# Altium PCB StepMotor_pcb.PcbDoc (part 2 of 2)
Units mm, origin at the board's own origin, x right, y up, seen from the top; angles counter-clockwise.
Board outline 118.92 x 65.15 mm, 2 copper layers (Top Layer, Bottom Layer); 184 components, 60 nets, 864 pads, 72 vias.
Unrouted connection lines stored in the file: 2.
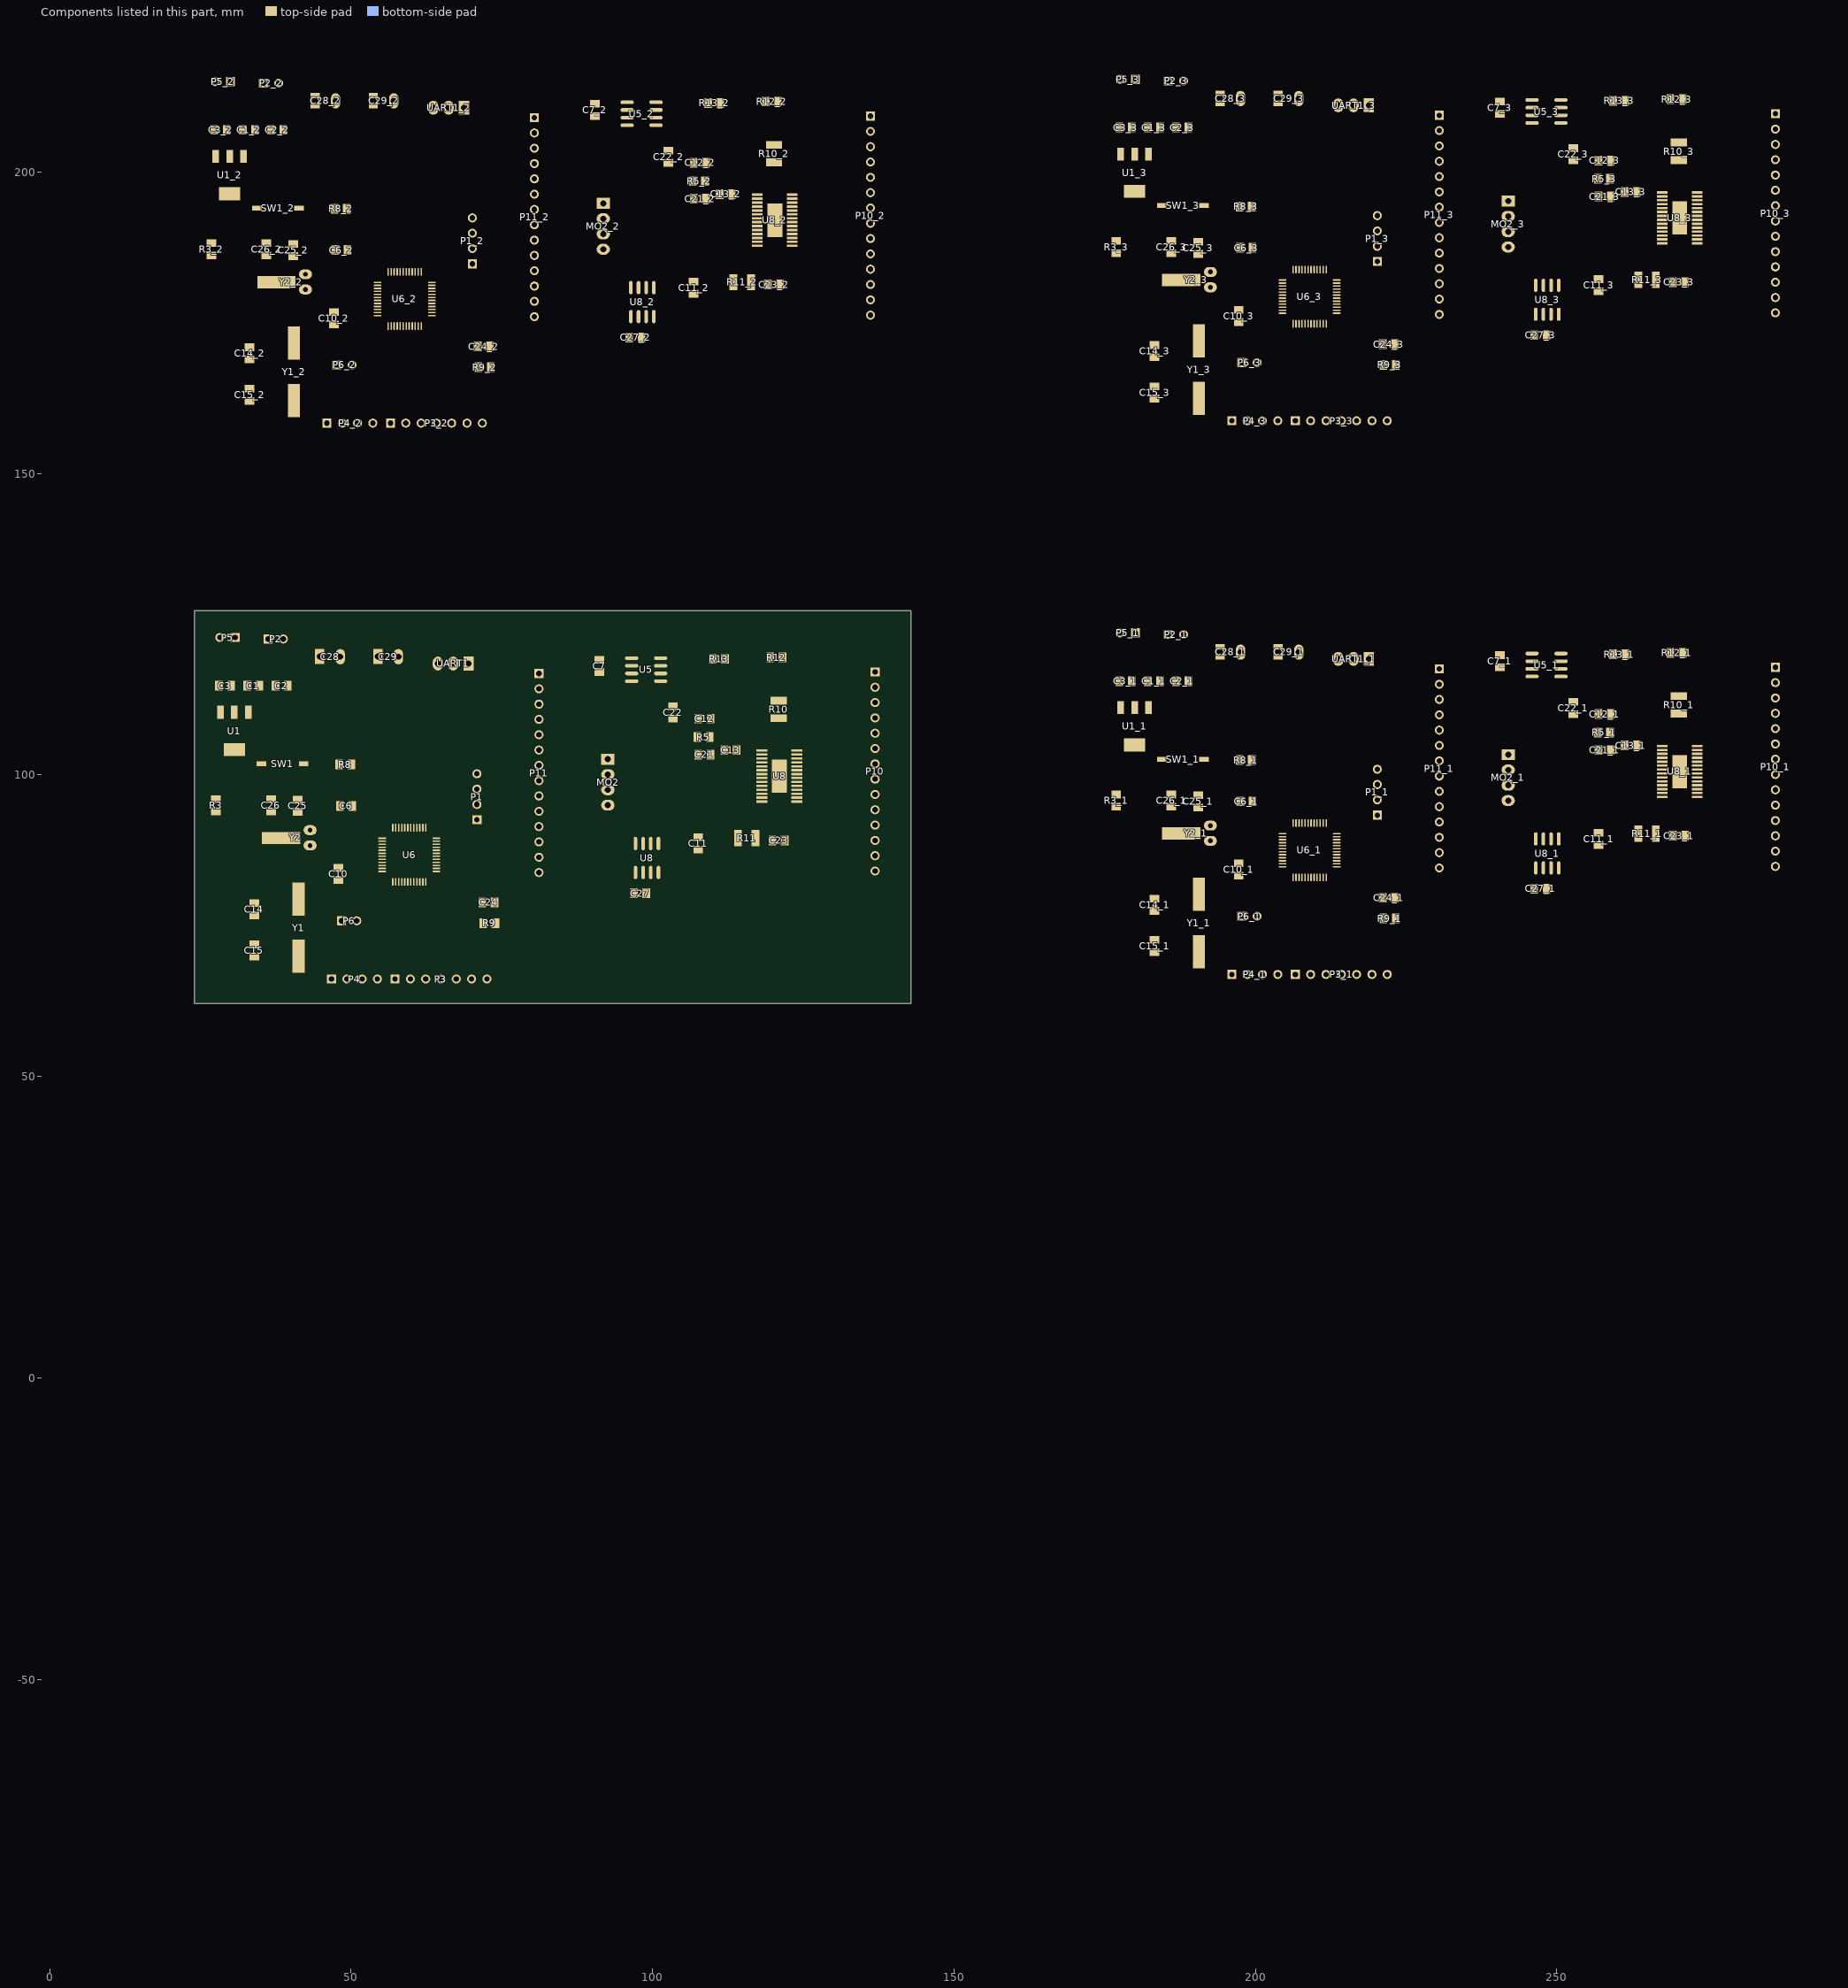
[diagram p2: the components of this part, seen from the top]

## Via types
v1: diameter 1.27, hole 0.711, Top Layer to Bottom Layer, 72 vias

## Nets (pads, with @x,y where several pads share a name; then routed paths per layer and width w, separated by ;. In a path a pad name is that pad's centre, name@x,y a point inside that pad or via, vN(x,y) a via of type N, cw(c..) or ccw(c..) an arc to the next point about the centre after c; other vN are vias at no path point) (continued)
pads on no net: C1_1.1 C1_1.2 C1_2.1 C1_2.2 C1_3.1 C1_3.2 C2_1.1 C2_1.2 C2_2.1 C2_2.2 C2_3.1 C2_3.2 C3_1.1 C3_1.2 C3_2.1 C3_2.2 C3_3.1 C3_3.2 C6_1.1 C6_1.2 C6_2.1 C6_2.2 C6_3.1 C6_3.2 C7_1.1 C7_1.2 C7_2.1 C7_2.2 C7_3.1 C7_3.2 C10_1.1 C10_1.2 C10_2.1 C10_2.2 C10_3.1 C10_3.2 C11_1.1 C11_1.2 C11_2.1 C11_2.2 C11_3.1 C11_3.2 C12_1.1 C12_1.2 C12_2.1 C12_2.2 C12_3.1 C12_3.2 C13_1.1 C13_1.2 C13_2.1 C13_2.2 C13_3.1 C13_3.2 C14_1.1 C14_1.2 C14_2.1 C14_2.2 C14_3.1 C14_3.2 C15_1.1 C15_1.2 C15_2.1 C15_2.2 C15_3.1 C15_3.2 C21_1.1 C21_1.2 C21_2.1 C21_2.2 C21_3.1 C21_3.2 C22_1.1 C22_1.2 C22_2.1 C22_2.2 C22_3.1 C22_3.2 C23_1.1 C23_1.2 C23_2.1 C23_2.2 C23_3.1 C23_3.2 C24_1.1 C24_1.2 C24_2.1 C24_2.2 C24_3.1 C24_3.2 C25_1.1 C25_1.2 C25_2.1 C25_2.2 C25_3.1 C25_3.2 C26_1.1 C26_1.2 C26_2.1 C26_2.2 C26_3.1 C26_3.2 C27_1.1 C27_1.2 C27_2.1 C27_2.2 C27_3.1 C27_3.2 C28_1.1 C28_1.2 C28_2.1 C28_2.2 C28_3.1 C28_3.2 C29_1.1 C29_1.2 C29_2.1 C29_2.2 C29_3.1 C29_3.2 MO2_1.1 MO2_1.2 MO2_1.3 MO2_1.4 MO2_2.1 MO2_2.2 MO2_2.3 MO2_2.4 MO2_3.1 MO2_3.2 MO2_3.3 MO2_3.4 P1_1.1 P1_1.2 P1_1.3 P1_1.4 P1_2.1 P1_2.2 P1_2.3 P1_2.4 P1_3.1 P1_3.2 P1_3.3 P1_3.4 P2_1.1 P2_1.2 P2_2.1 P2_2.2 P2_3.1 P2_3.2 P3.1 P3.2 P3.3 P3_1.1 P3_1.2 P3_1.3 P3_1.4 P3_1.5 P3_1.6 P3_1.7 P3_2.1 P3_2.2 P3_2.3 P3_2.4 P3_2.5 P3_2.6 P3_2.7 P3_3.1 P3_3.2 P3_3.3 P3_3.4 P3_3.5 P3_3.6 P3_3.7 P4_1.1 P4_1.2 P4_1.3 P4_1.4 P4_2.1 P4_2.2 P4_2.3 P4_2.4 P4_3.1 P4_3.2 P4_3.3 P4_3.4 P5_1.1 P5_1.2 P5_2.1 P5_2.2 P5_3.1 P5_3.2 P6_1.1 P6_1.2 P6_2.1 P6_2.2 P6_3.1 P6_3.2 P10.10 P10.14 P10_1.1 P10_1.2 P10_1.3 P10_1.4 P10_1.5 P10_1.6 P10_1.7 P10_1.8 P10_1.9 P10_1.10 P10_1.11 P10_1.12 P10_1.13 P10_1.14 P10_2.1 P10_2.2 P10_2.3 P10_2.4 P10_2.5 P10_2.6 P10_2.7 P10_2.8 P10_2.9 P10_2.10 P10_2.11 P10_2.12 P10_2.13 P10_2.14 P10_3.1 P10_3.2 P10_3.3 P10_3.4 P10_3.5 P10_3.6 P10_3.7 P10_3.8 P10_3.9 P10_3.10 P10_3.11 P10_3.12 P10_3.13 P10_3.14 P11.10 P11_1.1 P11_1.2 P11_1.3 P11_1.4 P11_1.5 P11_1.6 P11_1.7 P11_1.8 P11_1.9 P11_1.10 P11_1.11 P11_1.12 P11_1.13 P11_1.14 P11_2.1 P11_2.2 P11_2.3 P11_2.4 P11_2.5 P11_2.6 P11_2.7 P11_2.8 P11_2.9 P11_2.10 P11_2.11 P11_2.12 P11_2.13 P11_2.14 P11_3.1 P11_3.2 P11_3.3 P11_3.4 P11_3.5 P11_3.6 P11_3.7 P11_3.8 P11_3.9 P11_3.10 P11_3.11 P11_3.12 P11_3.13 P11_3.14 R3_1.1 R3_1.2 R3_2.1 R3_2.2 R3_3.1 R3_3.2 R5_1.1 R5_1.2 R5_2.1 R5_2.2 R5_3.1 R5_3.2 R8_1.1 R8_1.2 R8_2.1 R8_2.2 R8_3.1 R8_3.2 R9_1.1 R9_1.2 R9_2.1 R9_2.2 R9_3.1 R9_3.2 R10_1.1 R10_1.2 R10_2.1 R10_2.2 R10_3.1 R10_3.2 R11_1.1 R11_1.2 R11_2.1 R11_2.2 R11_3.1 R11_3.2 R12_1.1 R12_1.2 R12_2.1 R12_2.2 R12_3.1 R12_3.2 R13_1.1 R13_1.2 R13_2.1 R13_2.2 R13_3.1 R13_3.2 SW1_1.1 SW1_1.2 SW1_2.1 SW1_2.2 SW1_3.1 SW1_3.2 U1_1.1 U1_1.2 U1_1.3 U1_1.4 U1_2.1 U1_2.2 U1_2.3 U1_2.4 U1_3.1 U1_3.2 U1_3.3 U1_3.4 U5_1.1 U5_1.2 U5_1.3 U5_1.4 U5_1.5 U5_1.6 U5_1.7 U5_1.8 U5_2.1 U5_2.2 U5_2.3 U5_2.4 U5_2.5 U5_2.6 U5_2.7 U5_2.8 U5_3.1 U5_3.2 U5_3.3 U5_3.4 U5_3.5 U5_3.6 U5_3.7 U5_3.8 U6.2 U6.12 U6.13 U6.28 U6.33 U6.45 U6.46 U6_1.1 U6_1.2 U6_1.3 U6_1.4 U6_1.5 U6_1.6 U6_1.7 U6_1.8 U6_1.9 U6_1.10 U6_1.11 U6_1.12 U6_1.13 U6_1.14 U6_1.15 U6_1.16 U6_1.17 U6_1.18 U6_1.19 U6_1.20 U6_1.21 U6_1.22 U6_1.23 U6_1.24 U6_1.25 U6_1.26 U6_1.27 U6_1.28 U6_1.29 U6_1.30 U6_1.31 U6_1.32 U6_1.33 U6_1.34 U6_1.35 U6_1.36 U6_1.37 U6_1.38 U6_1.39 U6_1.40 U6_1.41 U6_1.42 U6_1.43 U6_1.44 U6_1.45 U6_1.46 U6_1.47 U6_1.48 U6_2.1 U6_2.2 U6_2.3 U6_2.4 U6_2.5 U6_2.6 U6_2.7 U6_2.8 U6_2.9 U6_2.10 U6_2.11 U6_2.12 U6_2.13 U6_2.14 U6_2.15 U6_2.16 U6_2.17 U6_2.18 U6_2.19 U6_2.20 U6_2.21 U6_2.22 U6_2.23 U6_2.24 U6_2.25 U6_2.26 U6_2.27 U6_2.28 U6_2.29 U6_2.30 U6_2.31 U6_2.32 U6_2.33 U6_2.34 U6_2.35 U6_2.36 U6_2.37 U6_2.38 U6_2.39 U6_2.40 U6_2.41 U6_2.42 U6_2.43 U6_2.44 U6_2.45 U6_2.46 U6_2.47 U6_2.48 U6_3.1 U6_3.2 U6_3.3 U6_3.4 U6_3.5 U6_3.6 U6_3.7 U6_3.8 U6_3.9 U6_3.10 U6_3.11 U6_3.12 U6_3.13 U6_3.14 U6_3.15 U6_3.16 U6_3.17 U6_3.18 U6_3.19 U6_3.20 U6_3.21 U6_3.22 U6_3.23 U6_3.24 U6_3.25 U6_3.26 U6_3.27 U6_3.28 U6_3.29 U6_3.30 U6_3.31 U6_3.32 U6_3.33 U6_3.34 U6_3.35 U6_3.36 U6_3.37 U6_3.38 U6_3.39 U6_3.40 U6_3.41 U6_3.42 U6_3.43 U6_3.44 U6_3.45 U6_3.46 U6_3.47 U6_3.48 U8.19 U8_1.1 U8_1.2 U8_1.3 U8_1.4 U8_1.5 U8_1.6 U8_1.7 U8_1.8 U8_1.9 U8_1.10 U8_1.11 U8_1.12 U8_1.13 U8_1.14 U8_1.15 U8_1.16 U8_1.17 U8_1.18 U8_1.19 U8_1.20 U8_1.21 U8_1.22 U8_1.23 U8_1.24 U8_1.25 U8_1.26 U8_1.27 U8_1.28 U8_1.29 U8_2.1 U8_2.2 U8_2.3 U8_2.4 U8_2.5 U8_2.6 U8_2.7 U8_2.8 U8_2.9 U8_2.10 U8_2.11 U8_2.12 U8_2.13 U8_2.14 U8_2.15 U8_2.16 U8_2.17 U8_2.18 U8_2.19 U8_2.20 U8_2.21 U8_2.22 U8_2.23 U8_2.24 U8_2.25 U8_2.26 U8_2.27 U8_2.28 U8_2.29 U8_3.1 U8_3.2 U8_3.3 U8_3.4 U8_3.5 U8_3.6 U8_3.7 U8_3.8 U8_3.9 U8_3.10 U8_3.11 U8_3.12 U8_3.13 U8_3.14 U8_3.15 U8_3.16 U8_3.17 U8_3.18 U8_3.19 U8_3.20 U8_3.21 U8_3.22 U8_3.23 U8_3.24 U8_3.25 U8_3.26 U8_3.27 U8_3.28 U8_3.29 UART1_1.1 UART1_1.2 UART1_1.3 UART1_2.1 UART1_2.2 UART1_2.3 UART1_3.1 UART1_3.2 UART1_3.3 Y1_1.1 Y1_1.2 Y1_2.1 Y1_2.2 Y1_3.1 Y1_3.2 Y2.3 Y2_1.1 Y2_1.2 Y2_1.3 Y2_2.1 Y2_2.2 Y2_2.3 Y2_3.1 Y2_3.2 Y2_3.3
copper on no net: | length 6570.1
  Top Layer w0.2: 35.052,186.182 35.941,186.182 ; 42.418,180.518 42.723,180.213 ; 54.355,176.692 54.376,176.713 ; 54.355,177.692 54.376,177.713 ; 54.376,178.213 54.397,178.234 56.642,178.234 ; 54.376,178.713 54.397,178.734 ; 56.625,183.461 56.625,178.251 56.642,178.234 ; 60.198,180.34 60.198,178.308 ; 61.146,174.969 61.146,174.698 61.104,174.656 61.104,175.173 60.163,176.114 60.198,176.149 60.198,178.308 ; 61.625,174.465 61.625,180.878 62.46,181.713 63.373,181.713 ; 63.373,179.213 63.394,179.234 ; 63.373,181.213 63.377,181.209 ; 67.945,156.972 67.945,160.782 ; 68.453,188.595 71.755,188.595 ; 70.993,171.069 70.993,169.926 71.564,169.355 72.707,169.355 73.152,168.91 ; v1(84.074,182.372) 84.074,183.134 ; 98.171,172.593 98.552,172.974 ; 100.203,176.035 104.788,176.035 106.807,178.054 106.807,179.832 ; v1(100.838,184.912) 106.299,190.373 115.189,190.373 115.824,191.008 117.335,191.008 117.373,191.046 ; 106.68,198.501 106.807,198.374 ; 115.57,192.786 116.118,193.334 116.118,193.352 116.325,193.559 117.296,193.559 117.373,193.637 ; 117.373,193.002 117.451,193.08 118.422,193.08 118.67,193.328 118.67,195.075 118.999,195.404 118.999,199.517 120.142,200.66 120.142,201.623 ; 185.166,94.742 186.055,94.742 ; 185.166,186.563 186.055,186.563 ; 192.532,89.078 192.837,88.773 ; 192.532,180.899 192.837,180.594 ; 204.469,85.252 204.49,85.273 ; 204.469,86.252 204.49,86.273 ; 204.469,177.073 204.49,177.094 ; 204.469,178.073 204.49,178.094 ; 204.49,86.773 204.511,86.794 206.756,86.794 ; 204.49,87.273 204.511,87.294 ; 204.49,178.594 204.511,178.615 206.756,178.615 ; 204.49,179.094 204.511,179.115 ; 206.739,92.021 206.739,86.811 206.756,86.794 ; 206.739,183.842 206.739,178.632 206.756,178.615 ; 210.312,88.9 210.312,86.868 ; 210.312,180.721 210.312,178.689 ; 211.26,83.529 211.26,83.258 211.218,83.216 211.218,83.733 210.277,84.674 210.312,84.709 210.312,86.868 ; 211.26,175.35 211.26,175.079 211.218,175.037 211.218,175.554 210.277,176.495 210.312,176.53 210.312,178.689 ; 211.739,83.025 211.739,89.438 212.574,90.273 213.487,90.273 ; 211.739,174.846 211.739,181.259 212.574,182.094 213.487,182.094 ; 213.487,87.773 213.508,87.794 ; 213.487,89.773 213.491,89.769 ; 213.487,179.594 213.508,179.615 ; 213.487,181.594 213.491,181.59 ; 218.059,65.532 218.059,69.342 ; 218.059,157.353 218.059,161.163 ; 218.567,97.155 221.869,97.155 ; 218.567,188.976 221.869,188.976 ; 221.107,79.629 221.107,78.486 221.678,77.915 222.821,77.915 223.266,77.47 ; 221.107,171.45 221.107,170.307 221.678,169.736 222.821,169.736 223.266,169.291 ; v1(234.188,90.932) 234.188,91.694 ; v1(234.188,182.753) 234.188,183.515 ; 248.285,81.153 248.666,81.534 ; 248.285,172.974 248.666,173.355 ; 250.317,84.595 254.902,84.595 256.921,86.614 256.921,88.392 ; 250.317,176.416 254.902,176.416 256.921,178.435 256.921,180.213 ; v1(250.952,93.472) 256.413,98.933 265.303,98.933 265.938,99.568 267.449,99.568 267.487,99.606 ; v1(250.952,185.293) 256.413,190.754 265.303,190.754 265.938,191.389 267.449,191.389 267.487,191.427 ; 256.794,107.061 256.921,106.934 ; 256.794,198.882 256.921,198.755 ; 265.684,101.346 266.232,101.894 266.232,101.912 266.439,102.119 267.41,102.119 267.487,102.197 ; 265.684,193.167 266.232,193.715 266.232,193.733 266.439,193.94 267.41,193.94 267.487,194.018 ; 267.487,101.562 267.565,101.64 268.536,101.64 268.784,101.888 268.784,103.635 269.113,103.964 269.113,108.077 270.256,109.22 270.256,110.183 ; 267.487,193.383 267.565,193.461 268.536,193.461 268.784,193.709 268.784,195.456 269.113,195.785 269.113,199.898 270.256,201.041 270.256,202.004 ; 56.642,178.234 60.124,178.234 60.198,178.308 ; 206.756,86.794 210.238,86.794 210.312,86.868 ; 206.756,178.615 210.238,178.615 210.312,178.689
  Top Layer w0.254: 113.157,196.342 114.808,196.342 115.557,195.593 117.373,195.593 ; 113.284,195.682 113.284,195.707 ; 117.551,195.682 117.627,195.605 ; 263.271,104.902 264.922,104.902 265.671,104.153 267.487,104.153 ; 263.271,196.723 264.922,196.723 265.671,195.974 267.487,195.974 ; 263.398,104.242 263.398,104.267 ; 263.398,196.063 263.398,196.088 ; 267.665,104.242 267.741,104.165 ; 267.665,196.063 267.741,195.986
  Top Layer w0.3: 35.052,186.182 33.02,184.15 33.02,179.451 34.163,178.308 40.208,178.308 42.418,180.518 ; 40.386,186.055 40.386,185.09 42.418,183.058 43.891,183.058 46.236,180.713 54.376,180.713 ; 40.513,162.128 43.129,162.128 43.434,162.433 43.434,176.276 46.371,179.213 54.376,179.213 ; 40.513,171.628 40.513,175.006 45.22,179.713 54.376,179.713 ; 42.723,180.213 54.376,180.213 ; 45.974,158.369 45.974,160.401 56.625,171.052 56.625,174.465 ; 47.117,174.752 48.006,174.752 51.467,178.213 54.376,178.213 ; 47.117,176.784 47.117,178.054 47.776,178.713 54.376,178.713 ; 47.244,193.929 47.244,192.786 48.133,191.897 49.403,191.897 ; 47.625,168.021 47.625,169.037 50.292,171.704 50.292,174.498 53.007,177.213 54.376,177.213 ; 48.514,158.369 48.514,161.544 57.125,170.155 57.125,174.465 ; v1(48.514,171.831) 48.514,173.863 52.343,177.692 54.355,177.692 ; 49.276,193.929 51.181,193.929 58.125,186.985 58.125,183.461 ; 49.403,187.071 49.403,191.897 ; 50.165,168.021 51.181,169.037 51.181,174.205 53.668,176.692 54.355,176.692 ; 51.054,158.369 51.054,162.814 57.625,169.385 57.625,174.465 ; 53.594,158.369 53.594,163.957 58.125,168.488 58.125,174.465 ; 54.376,181.713 51.586,181.713 v1(48.641,184.658) 49.403,185.42 55.499,185.42 56.121,184.798 56.121,183.461 ; 56.625,183.461 56.625,187.088 51.816,191.897 49.403,191.897 ; 58.617,183.461 58.617,200.857 63.627,205.867 63.627,210.693 ; 58.625,174.465 58.625,166.165 64.135,160.655 64.135,158.369 ; 59.121,183.461 59.121,199.837 59.309,200.025 66.167,206.883 66.167,210.693 ; 59.125,174.465 59.125,167.951 66.675,160.401 66.675,158.369 ; 59.625,174.465 59.625,169.102 67.945,160.782 ; 59.625,183.462 59.625,184.432 59.625,197.928 68.199,206.502 80.391,206.502 ; 60.125,174.465 60.125,169.999 69.215,160.909 69.215,158.369 ; 60.125,183.461 60.125,195.126 68.961,203.962 75.311,203.962 ; 60.198,180.34 67.056,187.198 ; 60.625,174.465 60.625,171.658 71.755,160.528 71.755,158.369 ; 60.625,183.461 60.625,193.467 68.58,201.422 74.676,201.422 80.391,201.422 ; 61.125,174.465 61.125,172.428 62.484,171.069 70.993,171.069 ; 61.125,183.461 61.125,191.046 68.961,198.882 74.041,198.882 80.391,198.882 ; 61.625,174.465 61.625,173.579 62.103,173.101 72.517,173.101 73.025,172.593 73.025,171.069 74.676,171.069 77.724,168.021 98.171,168.021 100.203,170.053 100.203,176.035 ; 61.625,183.461 61.625,187.99 63.5,189.865 66.294,189.865 67.183,189.865 70.104,189.865 ; 63.373,176.213 76.772,176.213 79.121,178.562 80.391,178.562 ; 63.373,176.713 74.986,176.713 79.375,181.102 80.391,181.102 ; 63.373,177.213 73.962,177.213 78.867,182.118 78.867,183.134 79.375,183.642 80.391,183.642 ; 63.373,178.213 72.93,178.213 77.851,183.134 77.851,187.706 78.867,188.722 80.391,188.722 ; 63.373,178.713 72.033,178.713 76.454,183.134 76.454,189.992 77.724,191.262 80.391,191.262 ; 63.373,179.713 70.366,179.713 74.168,183.515 74.168,192.786 77.724,196.342 80.391,196.342 ; 63.373,180.713 70.35,180.713 72.898,183.261 72.898,185.801 71.374,187.325 70.104,187.325 ; 63.373,181.713 65.254,181.713 68.326,184.785 70.104,184.785 ; 63.377,181.209 69.322,181.209 72.009,183.896 72.009,185.674 71.628,186.055 68.199,186.055 67.056,187.198 ; 63.394,179.234 71.157,179.234 75.565,183.642 75.565,191.516 77.851,193.802 80.391,193.802 ; 67.945,156.972 69.088,155.829 72.009,155.829 73.914,157.734 73.914,160.655 71.12,163.449 71.12,167.64 ; 68.453,188.595 67.056,187.198 ; 68.707,210.693 68.961,210.693 71.374,213.106 89.408,213.106 90.424,212.09 90.424,211.328 90.678,211.582 95.771,211.582 ; 70.104,192.405 71.374,192.405 72.39,191.389 72.39,189.23 71.755,188.595 ; 73.152,167.64 73.152,168.91 ; 75.057,203.962 80.391,203.962 ; 80.391,176.022 80.391,173.482 84.201,169.672 96.774,169.672 98.171,171.069 98.171,172.593 ; 80.391,209.042 81.407,210.058 88.392,210.058 89.154,209.296 90.424,209.296 90.678,209.042 95.771,209.042 ; v1(84.074,182.372) 84.074,199.644 92.202,207.772 95.771,207.772 ; 91.821,187.198 93.726,187.198 97.409,190.881 114.554,190.881 115.339,191.666 117.574,191.666 117.627,191.719 ; 91.821,189.738 90.043,189.738 89.027,188.722 89.027,183.642 91.834,180.835 96.393,180.835 97.663,180.835 ; 91.821,192.278 92.583,191.516 114.406,191.516 115.122,192.232 116.078,192.232 116.187,192.341 117.373,192.341 ; 95.771,210.172 95.771,210.312 95.771,211.582 ; 96.139,172.593 96.393,172.847 96.393,176.035 97.663,176.035 97.663,177.927 98.171,178.435 101.092,178.435 104.521,181.864 106.807,181.864 111.76,181.864 ; 98.552,172.974 98.552,174.371 98.933,174.752 98.933,176.035 ; 100.203,180.835 100.203,182.372 107.696,189.865 115.688,189.865 116.181,190.358 117.587,190.358 117.627,190.398 ; 100.571,209.042 100.698,207.772 108.204,207.772 ; 102.616,203.581 103.886,203.581 104.775,204.47 v1(108.966,204.47) 108.839,204.343 108.839,201.549 ; 106.68,198.501 106.807,198.628 ; 106.807,195.58 106.807,194.564 107.442,193.929 115.951,193.929 116.332,194.31 117.627,194.31 ; v1@107.823,187.96 v1(107.823,187.706) 109.22,189.103 115.71,189.103 116.304,189.697 117.561,189.697 117.627,189.763 ; 108.267,207.708 111.252,204.724 v1@111.252,200.152 ; 108.712,195.707 108.839,195.58 108.839,195.072 109.347,194.564 115.57,194.564 115.976,194.97 117.627,194.97 ; v1(111.252,192.786) 115.57,192.786 ; 111.252,195.707 111.252,197.739 111.633,198.12 114.3,198.12 116.154,196.266 117.627,196.266 ; v1(112.649,187.96) 115.422,187.96 115.917,188.455 117.373,188.455 ; 113.411,181.737 113.411,183.388 v1(114.935,184.912) ; 117.627,187.808 116.053,187.808 111.76,183.515 111.76,181.864 ; 117.627,188.402 117.627,189.103 ; 117.627,193.65 117.681,193.703 ; 119.126,181.102 119.126,181.356 118.11,181.356 117.729,181.737 116.311,181.737 116.311,179.303 116.078,179.07 113.03,179.07 111.76,180.34 111.76,181.864 ; 120.142,201.623 120.65,201.115 ; 120.142,204.523 119.941,204.724 119.56,204.343 v1(112.776,204.343) 112.776,205.994 109.22,209.55 109.22,211.455 107.315,211.455 105.537,213.233 96.647,213.233 95.771,212.357 95.771,211.582 ; 120.269,192.011 121.031,192.773 121.031,196.723 121.92,197.612 123.419,197.612 ; 123.165,193.637 126.2,193.637 131.699,199.136 136.144,199.136 ; 123.165,194.297 125.463,194.297 132.842,201.676 136.144,201.676 ; 123.165,194.958 124.981,194.958 134.239,204.216 136.144,204.216 ; 123.165,195.593 124.6,195.593 125.603,196.596 125.603,198.882 133.477,206.756 136.144,206.756 ; 123.419,188.468 124.333,188.468 133.985,178.816 136.144,178.816 ; 123.419,189.103 125.095,189.103 132.842,181.356 136.144,181.356 ; 123.419,189.763 125.959,189.763 131.826,183.896 136.144,183.896 ; 123.419,191.059 127.711,191.059 129.794,188.976 136.144,188.976 ; 123.419,191.719 135.941,191.719 136.144,191.516 ; 123.419,192.354 127.457,192.354 129.159,194.056 136.144,194.056 ; 123.419,193.015 126.721,193.015 130.302,196.596 136.144,196.596 ; 185.166,94.742 183.134,92.71 183.134,88.011 184.277,86.868 190.322,86.868 192.532,89.078 ; 185.166,186.563 183.134,184.531 183.134,179.832 184.277,178.689 190.322,178.689 192.532,180.899 ; 190.5,94.615 190.5,93.65 192.532,91.618 194.005,91.618 196.35,89.273 204.49,89.273 ; 190.5,186.436 190.5,185.471 192.532,183.439 194.005,183.439 196.35,181.094 204.49,181.094 ; 190.627,70.688 193.243,70.688 193.548,70.993 193.548,84.836 196.485,87.773 204.49,87.773 ; 190.627,80.188 190.627,83.566 195.334,88.273 204.49,88.273 ; 190.627,162.509 193.243,162.509 193.548,162.814 193.548,176.657 196.485,179.594 204.49,179.594 ; 190.627,172.009 190.627,175.387 195.334,180.094 204.49,180.094 ; 192.837,88.773 204.49,88.773 ; 192.837,180.594 204.49,180.594 ; 196.088,66.929 196.088,68.961 206.739,79.612 206.739,83.025 ; 196.088,158.75 196.088,160.782 206.739,171.433 206.739,174.846 ; 197.231,83.312 198.12,83.312 201.581,86.773 204.49,86.773 ; 197.231,85.344 197.231,86.614 197.89,87.273 204.49,87.273 ; 197.231,175.133 198.12,175.133 201.581,178.594 204.49,178.594 ; 197.231,177.165 197.231,178.435 197.89,179.094 204.49,179.094 ; 197.358,102.489 197.358,101.346 198.247,100.457 199.517,100.457 ; 197.358,194.31 197.358,193.167 198.247,192.278 199.517,192.278 ; 197.739,76.581 197.739,77.597 200.406,80.264 200.406,83.058 203.121,85.773 204.49,85.773 ; 197.739,168.402 197.739,169.418 200.406,172.085 200.406,174.879 203.121,177.594 204.49,177.594 ; 198.628,66.929 198.628,70.104 207.239,78.715 207.239,83.025 ; v1(198.628,80.391) 198.628,82.423 202.457,86.252 204.469,86.252 ; 198.628,158.75 198.628,161.925 207.239,170.536 207.239,174.846 ; v1(198.628,172.212) 198.628,174.244 202.457,178.073 204.469,178.073 ; 199.39,102.489 201.295,102.489 208.239,95.545 208.239,92.021 ; 199.39,194.31 201.295,194.31 208.239,187.366 208.239,183.842 ; 199.517,95.631 199.517,100.457 ; 199.517,187.452 199.517,192.278 ; 200.279,76.581 201.295,77.597 201.295,82.765 203.782,85.252 204.469,85.252 ; 200.279,168.402 201.295,169.418 201.295,174.586 203.782,177.073 204.469,177.073 ; 201.168,66.929 201.168,71.374 207.739,77.945 207.739,83.025 ; 201.168,158.75 201.168,163.195 207.739,169.766 207.739,174.846 ; 203.708,66.929 203.708,72.517 208.239,77.048 208.239,83.025 ; 203.708,158.75 203.708,164.338 208.239,168.869 208.239,174.846 ; 204.49,90.273 201.7,90.273 v1(198.755,93.218) 199.517,93.98 205.613,93.98 206.235,93.358 206.235,92.021 ; 204.49,182.094 201.7,182.094 v1(198.755,185.039) 199.517,185.801 205.613,185.801 206.235,185.179 206.235,183.842 ; 206.739,92.021 206.739,95.648 201.93,100.457 199.517,100.457 ; 206.739,183.842 206.739,187.469 201.93,192.278 199.517,192.278 ; 208.731,92.021 208.731,109.417 213.741,114.427 213.741,119.253 ; 208.731,183.842 208.731,201.238 213.741,206.248 213.741,211.074 ; 208.739,83.025 208.739,74.725 214.249,69.215 214.249,66.929 ; 208.739,174.846 208.739,166.546 214.249,161.036 214.249,158.75 ; 209.235,92.021 209.235,108.397 209.423,108.585 216.281,115.443 216.281,119.253 ; 209.235,183.842 209.235,200.218 209.423,200.406 216.281,207.264 216.281,211.074 ; 209.239,83.025 209.239,76.511 216.789,68.961 216.789,66.929 ; 209.239,174.846 209.239,168.332 216.789,160.782 216.789,158.75 ; 209.739,83.025 209.739,77.662 218.059,69.342 ; 209.739,92.022 209.739,92.992 209.739,106.488 218.313,115.062 230.505,115.062 ; 209.739,174.846 209.739,169.483 218.059,161.163 ; 209.739,183.843 209.739,184.813 209.739,198.309 218.313,206.883 230.505,206.883 ; 210.239,83.025 210.239,78.559 219.329,69.469 219.329,66.929 ; 210.239,92.021 210.239,103.686 219.075,112.522 225.425,112.522 ; 210.239,174.846 210.239,170.38 219.329,161.29 219.329,158.75 ; 210.239,183.842 210.239,195.507 219.075,204.343 225.425,204.343 ; 210.312,88.9 217.17,95.758 ; 210.312,180.721 217.17,187.579 ; 210.739,83.025 210.739,80.218 221.869,69.088 221.869,66.929 ; 210.739,92.021 210.739,102.027 218.694,109.982 224.79,109.982 230.505,109.982 ; 210.739,174.846 210.739,172.039 221.869,160.909 221.869,158.75 ; 210.739,183.842 210.739,193.848 218.694,201.803 224.79,201.803 230.505,201.803 ; 211.239,83.025 211.239,80.988 212.598,79.629 221.107,79.629 ; 211.239,92.021 211.239,99.606 219.075,107.442 224.155,107.442 230.505,107.442 ; 211.239,174.846 211.239,172.809 212.598,171.45 221.107,171.45 ; 211.239,183.842 211.239,191.427 219.075,199.263 224.155,199.263 230.505,199.263 ; 211.739,83.025 211.739,82.139 212.217,81.661 222.631,81.661 223.139,81.153 223.139,79.629 224.79,79.629 227.838,76.581 248.285,76.581 250.317,78.613 250.317,84.595 ; 211.739,92.021 211.739,96.55 213.614,98.425 216.408,98.425 217.297,98.425 220.218,98.425 ; 211.739,174.846 211.739,173.96 212.217,173.482 222.631,173.482 223.139,172.974 223.139,171.45 224.79,171.45 227.838,168.402 248.285,168.402 250.317,170.434 250.317,176.416 ; 211.739,183.842 211.739,188.371 213.614,190.246 216.408,190.246 217.297,190.246 220.218,190.246 ; 213.487,84.773 226.886,84.773 229.235,87.122 230.505,87.122 ; 213.487,85.273 225.1,85.273 229.489,89.662 230.505,89.662 ; 213.487,85.773 224.076,85.773 228.981,90.678 228.981,91.694 229.489,92.202 230.505,92.202 ; 213.487,86.773 223.044,86.773 227.965,91.694 227.965,96.266 228.981,97.282 230.505,97.282 ; 213.487,87.273 222.147,87.273 226.568,91.694 226.568,98.552 227.838,99.822 230.505,99.822 ; 213.487,88.273 220.48,88.273 224.282,92.075 224.282,101.346 227.838,104.902 230.505,104.902 ; 213.487,89.273 220.464,89.273 223.012,91.821 223.012,94.361 221.488,95.885 220.218,95.885 ; 213.487,90.273 215.368,90.273 218.44,93.345 220.218,93.345 ; 213.487,176.594 226.886,176.594 229.235,178.943 230.505,178.943 ; 213.487,177.094 225.1,177.094 229.489,181.483 230.505,181.483 ; 213.487,177.594 224.076,177.594 228.981,182.499 228.981,183.515 229.489,184.023 230.505,184.023 ; 213.487,178.594 223.044,178.594 227.965,183.515 227.965,188.087 228.981,189.103 230.505,189.103 ; 213.487,179.094 222.147,179.094 226.568,183.515 226.568,190.373 227.838,191.643 230.505,191.643 ; 213.487,180.094 220.48,180.094 224.282,183.896 224.282,193.167 227.838,196.723 230.505,196.723 ; 213.487,181.094 220.464,181.094 223.012,183.642 223.012,186.182 221.488,187.706 220.218,187.706 ; 213.487,182.094 215.368,182.094 218.44,185.166 220.218,185.166 ; 213.491,89.769 219.436,89.769 222.123,92.456 222.123,94.234 221.742,94.615 218.313,94.615 217.17,95.758 ; 213.491,181.59 219.436,181.59 222.123,184.277 222.123,186.055 221.742,186.436 218.313,186.436 217.17,187.579 ; 213.508,87.794 221.271,87.794 225.679,92.202 225.679,100.076 227.965,102.362 230.505,102.362 ; 213.508,179.615 221.271,179.615 225.679,184.023 225.679,191.897 227.965,194.183 230.505,194.183 ; 218.059,65.532 219.202,64.389 222.123,64.389 224.028,66.294 224.028,69.215 221.234,72.009 221.234,76.2 ; 218.059,157.353 219.202,156.21 222.123,156.21 224.028,158.115 224.028,161.036 221.234,163.83 221.234,168.021 ; 218.567,97.155 217.17,95.758 ; 218.567,188.976 217.17,187.579 ; 218.821,119.253 219.075,119.253 221.488,121.666 239.522,121.666 240.538,120.65 240.538,119.888 240.792,120.142 245.885,120.142 ; 218.821,211.074 219.075,211.074 221.488,213.487 239.522,213.487 240.538,212.471 240.538,211.709 240.792,211.963 245.885,211.963 ; 220.218,100.965 221.488,100.965 222.504,99.949 222.504,97.79 221.869,97.155 ; 220.218,192.786 221.488,192.786 222.504,191.77 222.504,189.611 221.869,188.976 ; 223.266,76.2 223.266,77.47 ; 223.266,168.021 223.266,169.291 ; 225.171,112.522 230.505,112.522 ; 225.171,204.343 230.505,204.343 ; 230.505,84.582 230.505,82.042 234.315,78.232 246.888,78.232 248.285,79.629 248.285,81.153 ; 230.505,117.602 231.521,118.618 238.506,118.618 239.268,117.856 240.538,117.856 240.792,117.602 245.885,117.602 ; 230.505,176.403 230.505,173.863 234.315,170.053 246.888,170.053 248.285,171.45 248.285,172.974 ; 230.505,209.423 231.521,210.439 238.506,210.439 239.268,209.677 240.538,209.677 240.792,209.423 245.885,209.423 ; v1(234.188,90.932) 234.188,108.204 242.316,116.332 245.885,116.332 ; v1(234.188,182.753) 234.188,200.025 242.316,208.153 245.885,208.153 ; 241.935,95.758 243.84,95.758 247.523,99.441 264.668,99.441 265.453,100.226 267.688,100.226 267.741,100.279 ; 241.935,98.298 240.157,98.298 239.141,97.282 239.141,92.202 241.948,89.395 246.507,89.395 247.777,89.395 ; 241.935,100.838 242.697,100.076 264.52,100.076 265.236,100.792 266.192,100.792 266.301,100.901 267.487,100.901 ; 241.935,187.579 243.84,187.579 247.523,191.262 264.668,191.262 265.453,192.047 267.688,192.047 267.741,192.1 ; 241.935,190.119 240.157,190.119 239.141,189.103 239.141,184.023 241.948,181.216 246.507,181.216 247.777,181.216 ; 241.935,192.659 242.697,191.897 264.52,191.897 265.236,192.613 266.192,192.613 266.301,192.722 267.487,192.722 ; 245.885,118.732 245.885,118.872 245.885,120.142 ; 245.885,210.553 245.885,210.693 245.885,211.963 ; 246.253,81.153 246.507,81.407 246.507,84.595 247.777,84.595 247.777,86.487 248.285,86.995 251.206,86.995 254.635,90.424 256.921,90.424 261.874,90.424 ; 246.253,172.974 246.507,173.228 246.507,176.416 247.777,176.416 247.777,178.308 248.285,178.816 251.206,178.816 254.635,182.245 256.921,182.245 261.874,182.245 ; 248.666,81.534 248.666,82.931 249.047,83.312 249.047,84.595 ; 248.666,173.355 248.666,174.752 249.047,175.133 249.047,176.416 ; 250.317,89.395 250.317,90.932 257.81,98.425 265.802,98.425 266.295,98.918 267.701,98.918 267.741,98.958 ; 250.317,181.216 250.317,182.753 257.81,190.246 265.802,190.246 266.295,190.739 267.701,190.739 267.741,190.779 ; 250.685,117.602 250.812,116.332 258.318,116.332 ; 250.685,209.423 250.812,208.153 258.318,208.153 ; 252.73,112.141 254,112.141 254.889,113.03 v1(259.08,113.03) 258.953,112.903 258.953,110.109 ; 252.73,203.962 254,203.962 254.889,204.851 v1(259.08,204.851) 258.953,204.724 258.953,201.93 ; 256.794,107.061 256.921,107.188 ; 256.794,198.882 256.921,199.009 ; 256.921,104.14 256.921,103.124 257.556,102.489 266.065,102.489 266.446,102.87 267.741,102.87 ; 256.921,195.961 256.921,194.945 257.556,194.31 266.065,194.31 266.446,194.691 267.741,194.691 ; v1@257.937,96.52 v1(257.937,96.266) 259.334,97.663 265.824,97.663 266.418,98.257 267.675,98.257 267.741,98.323 ; v1@257.937,188.341 v1(257.937,188.087) 259.334,189.484 265.824,189.484 266.418,190.078 267.675,190.078 267.741,190.144 ; 258.382,116.268 261.366,113.284 v1@261.366,108.712 ; 258.382,208.089 261.366,205.105 v1@261.366,200.533 ; 258.826,104.267 258.953,104.14 258.953,103.632 259.461,103.124 265.684,103.124 266.09,103.53 267.741,103.53 ; 258.826,196.088 258.953,195.961 258.953,195.453 259.461,194.945 265.684,194.945 266.09,195.351 267.741,195.351 ; v1(261.366,101.346) 265.684,101.346 ; 261.366,104.267 261.366,106.299 261.747,106.68 264.414,106.68 266.268,104.826 267.741,104.826 ; v1(261.366,193.167) 265.684,193.167 ; 261.366,196.088 261.366,198.12 261.747,198.501 264.414,198.501 266.268,196.647 267.741,196.647 ; v1(262.763,96.52) 265.536,96.52 266.031,97.015 267.487,97.015 ; v1(262.763,188.341) 265.536,188.341 266.031,188.836 267.487,188.836 ; 263.525,90.297 263.525,91.948 v1(265.049,93.472) ; 263.525,182.118 263.525,183.769 v1(265.049,185.293) ; 267.741,96.368 266.167,96.368 261.874,92.075 261.874,90.424 ; 267.741,96.962 267.741,97.663 ; 267.741,102.21 267.795,102.263 ; 267.741,188.189 266.167,188.189 261.874,183.896 261.874,182.245 ; 267.741,188.783 267.741,189.484 ; 267.741,194.031 267.795,194.084 ; 269.24,89.662 269.24,89.916 268.224,89.916 267.843,90.297 266.425,90.297 266.425,87.863 266.192,87.63 263.144,87.63 261.874,88.9 261.874,90.424 ; 269.24,181.483 269.24,181.737 268.224,181.737 267.843,182.118 266.425,182.118 266.425,179.684 266.192,179.451 263.144,179.451 261.874,180.721 261.874,182.245 ; 270.256,110.183 270.764,109.675 ; 270.256,113.083 270.055,113.284 269.674,112.903 v1(262.89,112.903) 262.89,114.554 259.334,118.11 259.334,120.015 257.429,120.015 255.651,121.793 246.761,121.793 245.885,120.917 245.885,120.142 ; 270.256,202.004 270.764,201.496 ; 270.256,204.904 270.055,205.105 269.674,204.724 v1(262.89,204.724) 262.89,206.375 259.334,209.931 259.334,211.836 257.429,211.836 255.651,213.614 246.761,213.614 245.885,212.738 245.885,211.963 ; 270.383,100.571 271.145,101.333 271.145,105.283 272.034,106.172 273.533,106.172 ; 270.383,192.392 271.145,193.154 271.145,197.104 272.034,197.993 273.533,197.993 ; 273.279,102.197 276.314,102.197 281.813,107.696 286.258,107.696 ; 273.279,102.857 275.577,102.857 282.956,110.236 286.258,110.236 ; 273.279,103.518 275.095,103.518 284.353,112.776 286.258,112.776 ; 273.279,104.153 274.714,104.153 275.717,105.156 275.717,107.442 283.591,115.316 286.258,115.316 ; 273.279,194.018 276.314,194.018 281.813,199.517 286.258,199.517 ; 273.279,194.678 275.577,194.678 282.956,202.057 286.258,202.057 ; 273.279,195.339 275.095,195.339 284.353,204.597 286.258,204.597 ; 273.279,195.974 274.714,195.974 275.717,196.977 275.717,199.263 283.591,207.137 286.258,207.137 ; 273.533,97.028 274.447,97.028 284.099,87.376 286.258,87.376 ; 273.533,97.663 275.209,97.663 282.956,89.916 286.258,89.916 ; 273.533,98.323 276.073,98.323 281.94,92.456 286.258,92.456 ; 273.533,99.619 277.825,99.619 279.908,97.536 286.258,97.536 ; 273.533,100.279 286.055,100.279 286.258,100.076 ; 273.533,100.914 277.571,100.914 279.273,102.616 286.258,102.616 ; 273.533,101.575 276.835,101.575 280.416,105.156 286.258,105.156 ; 273.533,188.849 274.447,188.849 284.099,179.197 286.258,179.197 ; 273.533,189.484 275.209,189.484 282.956,181.737 286.258,181.737 ; 273.533,190.144 276.073,190.144 281.94,184.277 286.258,184.277 ; 273.533,191.44 277.825,191.44 279.908,189.357 286.258,189.357 ; 273.533,192.1 286.055,192.1 286.258,191.897 ; 273.533,192.735 277.571,192.735 279.273,194.437 286.258,194.437 ; 273.533,193.396 276.835,193.396 280.416,196.977 286.258,196.977
  Top Layer w0.35: 120.777,211.709 122.682,213.614 137.541,213.614 140.589,210.566 140.589,176.53 138.176,174.117 130.683,174.117 123.444,181.356 121.158,181.356 ; 270.891,120.269 272.796,122.174 287.655,122.174 290.703,119.126 290.703,85.09 288.29,82.677 280.797,82.677 273.558,89.916 271.272,89.916 ; 270.891,212.09 272.796,213.995 287.655,213.995 290.703,210.947 290.703,176.911 288.29,174.498 280.797,174.498 273.558,181.737 271.272,181.737
  Top Layer w0.381: 91.821,194.818 94.615,194.818 98.044,198.247 98.044,208.661 99.695,210.312 100.571,210.312 100.571,211.582 ; 241.935,103.378 244.729,103.378 248.158,106.807 248.158,117.221 249.809,118.872 250.685,118.872 250.685,120.142 ; 241.935,195.199 244.729,195.199 248.158,198.628 248.158,209.042 249.809,210.693 250.685,210.693 250.685,211.963
  Top Layer w0.5: 26.797,186.182 24.765,186.182 24.511,186.436 24.511,193.242 27.686,196.417 29.845,196.417 ; 27.305,215.011 27.305,207.01 27.305,204.913 27.545,204.673 27.545,202.617 ; 29.337,207.01 29.337,210.82 29.972,211.455 ; 29.972,215.011 29.972,211.455 ; 33.147,162.052 40.437,162.052 40.513,162.128 ; 33.147,164.084 33.147,168.91 31.75,168.91 31.115,169.545 31.115,184.785 34.544,188.214 35.941,188.214 40.259,188.214 40.386,188.341 v1(43.053,188.341) ; 33.147,170.942 36.474,170.942 37.16,171.628 40.513,171.628 ; 34.036,207.01 34.036,205.613 32.145,203.722 32.145,202.617 38.683,202.617 38.735,202.565 ; 34.346,194.056 29.718,194.056 26.797,191.135 26.797,188.214 28.575,188.214 29.083,187.706 29.083,161.163 33.528,156.718 40.64,156.718 45.339,161.417 45.339,176.403 45.72,176.784 47.117,176.784 ; 35.433,214.757 35.433,211.455 ; 36.703,207.01 36.703,208.407 35.814,209.296 33.02,209.296 32.004,208.28 32.004,207.01 32.004,205.994 30.836,204.826 30.709,204.826 29.845,203.962 29.845,202.617 29.845,196.417 ; 37.973,214.757 41.11,214.757 44.018,211.849 44.018,214.198 44.704,214.884 52.578,214.884 53.67,213.792 53.67,212.674 ; v1(43.053,192.532) 43.053,194.056 ; 47.244,193.929 47.117,194.056 43.053,194.056 ; v1(48.641,184.658) 47.371,185.928 47.371,187.071 43.815,190.627 40.64,190.627 34.85,196.417 29.845,196.417 ; 53.67,211.849 53.67,212.674 ; 68.707,210.693 68.707,212.471 66.548,214.63 59.309,214.63 57.074,212.395 57.074,211.823 57.074,210.49 55.118,208.534 52.705,208.534 49.416,211.823 47.422,211.823 47.422,209.601 44.831,207.01 38.735,207.01 ; 98.933,180.835 100.203,180.835 ; v1(100.965,196.342) 102.616,197.993 102.616,201.549 106.807,201.549 106.807,198.628 ; v1@101.028,216.535 57.531,216.535 53.67,212.674 ; 106.807,198.374 106.807,195.58 104.902,195.58 104.267,194.945 104.267,193.421 105.029,192.659 v1(107.188,192.659) ; 108.712,195.707 108.712,198.501 ; 111.252,211.455 114.859,211.455 115.113,211.709 118.745,211.709 ; 119.126,181.356 119.126,182.88 120.269,184.023 120.269,192.011 ; 120.142,204.523 123.419,204.523 ; 121.158,181.356 121.158,183.058 123.419,185.318 123.419,187.706 ; 123.419,196.313 123.419,204.523 ; 136.144,209.296 130.048,209.296 125.275,204.523 123.419,204.523 ; 176.911,94.742 174.879,94.742 174.625,94.996 174.625,101.802 177.8,104.977 179.959,104.977 ; 176.911,186.563 174.879,186.563 174.625,186.817 174.625,193.623 177.8,196.798 179.959,196.798 ; 177.419,123.571 177.419,115.57 177.419,113.473 177.659,113.233 177.659,111.177 ; 177.419,215.392 177.419,207.391 177.419,205.294 177.659,205.054 177.659,202.998 ; 179.451,115.57 179.451,119.38 180.086,120.015 ; 179.451,207.391 179.451,211.201 180.086,211.836 ; 180.086,123.571 180.086,120.015 ; 180.086,215.392 180.086,211.836 ; 183.261,70.612 190.551,70.612 190.627,70.688 ; 183.261,72.644 183.261,77.47 181.864,77.47 181.229,78.105 181.229,93.345 184.658,96.774 186.055,96.774 190.373,96.774 190.5,96.901 v1(193.167,96.901) ; 183.261,79.502 186.588,79.502 187.274,80.188 190.627,80.188 ; 183.261,162.433 190.551,162.433 190.627,162.509 ; 183.261,164.465 183.261,169.291 181.864,169.291 181.229,169.926 181.229,185.166 184.658,188.595 186.055,188.595 190.373,188.595 190.5,188.722 v1(193.167,188.722) ; 183.261,171.323 186.588,171.323 187.274,172.009 190.627,172.009 ; 184.15,115.57 184.15,114.173 182.259,112.282 182.259,111.177 188.797,111.177 188.849,111.125 ; 184.15,207.391 184.15,205.994 182.259,204.103 182.259,202.998 188.797,202.998 188.849,202.946 ; 184.46,102.616 179.832,102.616 176.911,99.695 176.911,96.774 178.689,96.774 179.197,96.266 179.197,69.723 183.642,65.278 190.754,65.278 195.453,69.977 195.453,84.963 195.834,85.344 197.231,85.344 ; 184.46,194.437 179.832,194.437 176.911,191.516 176.911,188.595 178.689,188.595 179.197,188.087 179.197,161.544 183.642,157.099 190.754,157.099 195.453,161.798 195.453,176.784 195.834,177.165 197.231,177.165 ; 185.547,123.317 185.547,120.015 ; 185.547,215.138 185.547,211.836 ; 186.817,115.57 186.817,116.967 185.928,117.856 183.134,117.856 182.118,116.84 182.118,115.57 182.118,114.554 180.95,113.386 180.823,113.386 179.959,112.522 179.959,111.177 179.959,104.977 ; 186.817,207.391 186.817,208.788 185.928,209.677 183.134,209.677 182.118,208.661 182.118,207.391 182.118,206.375 180.95,205.207 180.823,205.207 179.959,204.343 179.959,202.998 179.959,196.798 ; 188.087,123.317 191.224,123.317 194.132,120.409 194.132,122.758 194.818,123.444 202.692,123.444 203.784,122.352 203.784,121.234 ; 188.087,215.138 191.224,215.138 194.132,212.23 194.132,214.579 194.818,215.265 202.692,215.265 203.784,214.173 203.784,213.055 ; v1(193.167,101.092) 193.167,102.616 ; v1(193.167,192.913) 193.167,194.437 ; 197.358,102.489 197.231,102.616 193.167,102.616 ; 197.358,194.31 197.231,194.437 193.167,194.437 ; v1(198.755,93.218) 197.485,94.488 197.485,95.631 193.929,99.187 190.754,99.187 184.964,104.977 179.959,104.977 ; v1(198.755,185.039) 197.485,186.309 197.485,187.452 193.929,191.008 190.754,191.008 184.964,196.798 179.959,196.798 ; 203.784,120.409 203.784,121.234 ; 203.784,212.23 203.784,213.055 ; 218.821,119.253 218.821,121.031 216.662,123.19 209.423,123.19 207.188,120.955 207.188,120.383 207.188,119.05 205.232,117.094 202.819,117.094 199.53,120.383 197.536,120.383 197.536,118.161 194.945,115.57 188.849,115.57 ; 218.821,211.074 218.821,212.852 216.662,215.011 209.423,215.011 207.188,212.776 207.188,212.204 207.188,210.871 205.232,208.915 202.819,208.915 199.53,212.204 197.536,212.204 197.536,209.982 194.945,207.391 188.849,207.391 ; 249.047,89.395 250.317,89.395 ; 249.047,181.216 250.317,181.216 ; v1(251.079,104.902) 252.73,106.553 252.73,110.109 256.921,110.109 256.921,107.188 ; v1(251.079,196.723) 252.73,198.374 252.73,201.93 256.921,201.93 256.921,199.009 ; v1@251.142,125.095 207.645,125.095 203.784,121.234 ; v1@251.142,216.916 207.645,216.916 203.784,213.055 ; 256.921,106.934 256.921,104.14 255.016,104.14 254.381,103.505 254.381,101.981 255.143,101.219 v1(257.302,101.219) ; 256.921,198.755 256.921,195.961 255.016,195.961 254.381,195.326 254.381,193.802 255.143,193.04 v1(257.302,193.04) ; 258.826,104.267 258.826,107.061 ; 258.826,196.088 258.826,198.882 ; 261.366,120.015 264.973,120.015 265.227,120.269 268.859,120.269 ; 261.366,211.836 264.973,211.836 265.227,212.09 268.859,212.09 ; 269.24,89.916 269.24,91.44 270.383,92.583 270.383,100.571 ; 269.24,181.737 269.24,183.261 270.383,184.404 270.383,192.392 ; 270.256,113.083 273.533,113.083 ; 270.256,204.904 273.533,204.904 ; 271.272,89.916 271.272,91.618 273.533,93.878 273.533,96.266 ; 271.272,181.737 271.272,183.439 273.533,185.699 273.533,188.087 ; 273.533,104.873 273.533,113.083 ; 273.533,196.694 273.533,204.904 ; 286.258,117.856 280.162,117.856 275.389,113.083 273.533,113.083 ; 286.258,209.677 280.162,209.677 275.389,204.904 273.533,204.904 ; 29.972,211.455 35.433,211.455 ; 35.433,211.455 37.465,211.455 38.735,210.185 38.735,207.01 ; 38.735,202.565 38.735,199.136 41.346,196.525 41.346,194.056 43.053,194.056 ; 38.735,202.565 38.735,207.01 ; 180.086,120.015 185.547,120.015 ; 180.086,211.836 185.547,211.836 ; 185.547,120.015 187.579,120.015 188.849,118.745 188.849,115.57 ; 185.547,211.836 187.579,211.836 188.849,210.566 188.849,207.391 ; 188.849,111.125 188.849,107.696 191.46,105.085 191.46,102.616 193.167,102.616 ; 188.849,111.125 188.849,115.57 ; 188.849,202.946 188.849,199.517 191.46,196.906 191.46,194.437 193.167,194.437 ; 188.849,202.946 188.849,207.391
  Bottom Layer w0.2: v1(48.514,171.831) 48.514,184.531 v1(48.641,184.658) 63.754,184.658 v1(65.913,182.499) 66.04,182.372 v1(84.074,182.372) ; v1(198.628,80.391) 198.628,93.091 v1(198.755,93.218) 213.868,93.218 v1(216.027,91.059) 216.154,90.932 v1(234.188,90.932) ; v1(198.628,172.212) 198.628,184.912 v1(198.755,185.039) 213.868,185.039 v1(216.027,182.88) 216.154,182.753 v1(234.188,182.753)
  Bottom Layer w0.3: v1(100.838,184.912) v1(114.935,184.912) ; v1(107.188,192.659) 107.442,192.659 107.823,192.278 v1(107.823,187.706) ; v1(108.966,204.47) 108.712,204.47 108.839,204.343 v1(112.776,204.343) ; v1(111.252,192.786) v1(111.252,199.898) ; v1(250.952,93.472) v1(265.049,93.472) ; v1(250.952,185.293) v1(265.049,185.293) ; v1(257.302,101.219) 257.556,101.219 257.937,100.838 v1(257.937,96.266) ; v1(257.302,193.04) 257.556,193.04 257.937,192.659 v1(257.937,188.087) ; v1(259.08,113.03) 258.826,113.03 258.953,112.903 v1(262.89,112.903) ; v1(259.08,204.851) 258.826,204.851 258.953,204.724 v1(262.89,204.724) ; v1(261.366,101.346) v1(261.366,108.458) ; v1(261.366,193.167) v1(261.366,200.279)
  Bottom Layer w0.5: v1(43.053,188.341) v1(43.053,192.532) ; v1(100.965,196.342) 100.965,216.535 v1(101.028,216.599) ; v1(112.649,187.96) 114.427,189.738 v1(114.427,211.582) ; v1(193.167,96.901) v1(193.167,101.092) ; v1(193.167,188.722) v1(193.167,192.913) ; v1(251.079,104.902) 251.079,125.095 v1(251.142,125.158) ; v1(251.079,196.723) 251.079,216.916 v1(251.142,216.98) ; v1(262.763,96.52) 264.541,98.298 v1(264.541,120.142) ; v1(262.763,188.341) 264.541,190.119 v1(264.541,211.963)

## Keep-outs
Bottom Layer:
  lines w0.254: 34.798,215.265 34.798,215.392 ; 35.56,123.063 35.56,123.19 ; 184.912,123.825 184.912,123.952 ; 184.912,215.646 184.912,215.773
Keep-Out Layer:
  lines w0.5: 23.195,154.305 23.195,219.451 142.113,219.451 142.113,154.305 23.195,154.305 ; 23.957,62.103 142.875,62.103 142.875,127.249 23.957,127.249 23.957,62.103 ; 173.309,62.865 173.309,128.011 292.227,128.011 292.227,62.865 173.309,62.865 ; 173.309,154.686 173.309,219.832 292.227,219.832 292.227,154.686 173.309,154.686
  lines w1: 3.688,-92.629 62.523,-92.629 ; 15.626,-88.819 74.461,-88.819 ; 124.973,-70.023 183.808,-70.023

## Silkscreen, mask and mechanical layers (free items; w line width, h text height)
Top Overlay:
  text "BRIDGE H BOARD DRIVER_V1.1" at 237.877,157.938 h2 r359.44
  text "BRIDGE H BOARD DRIVER_V1.1" at 87.763,157.557 h2 r359.44
  text "BRIDGE H BOARD DRIVER_V1.1" at 237.877,66.117 h2 r359.44
  text "BRIDGE H BOARD DRIVER_V1.1" at 88.525,65.355 h2 r359.44